# Altium PCB deprecated-layout.PcbDoc
Units mil, origin at the board's own origin, x right, y up, seen from the top; angles counter-clockwise.
Board outline 1220.47 x 1233.89 mil, 2 copper layers (Top Layer, Bottom Layer); 14 components, 11 nets, 51 pads, 0 vias.
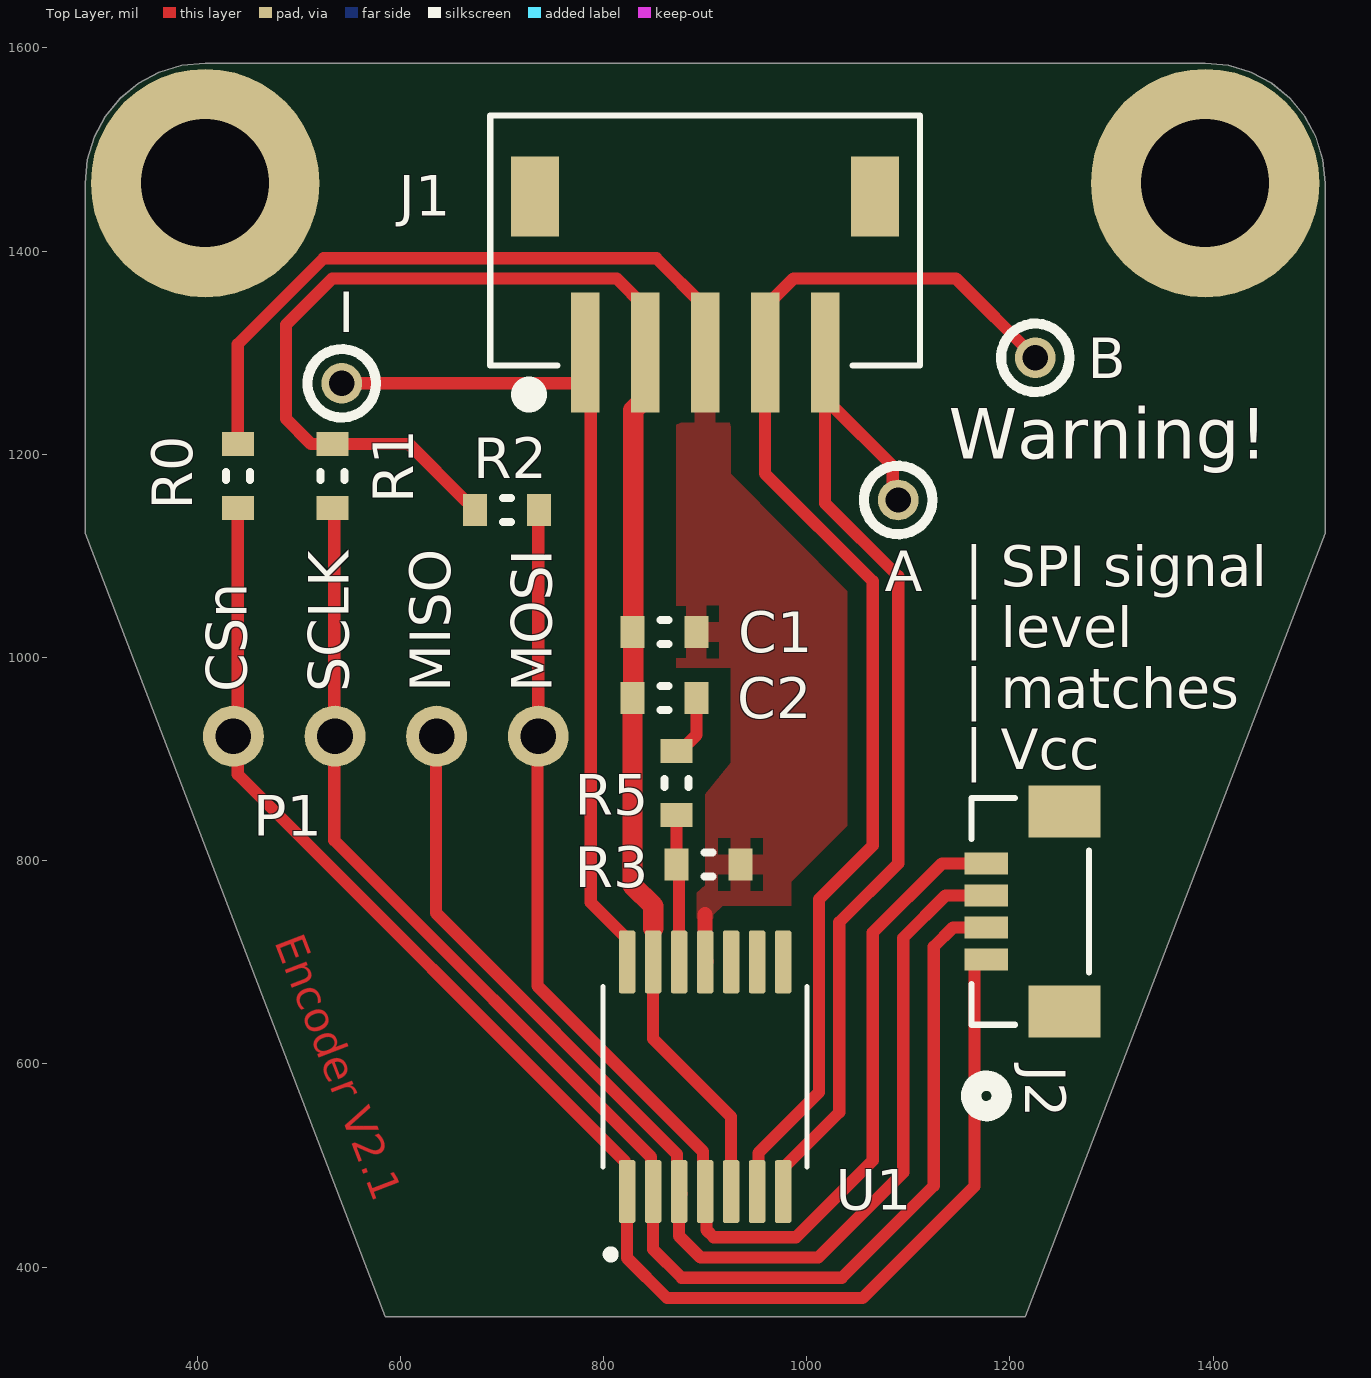
[diagram p0: Top Layer view]
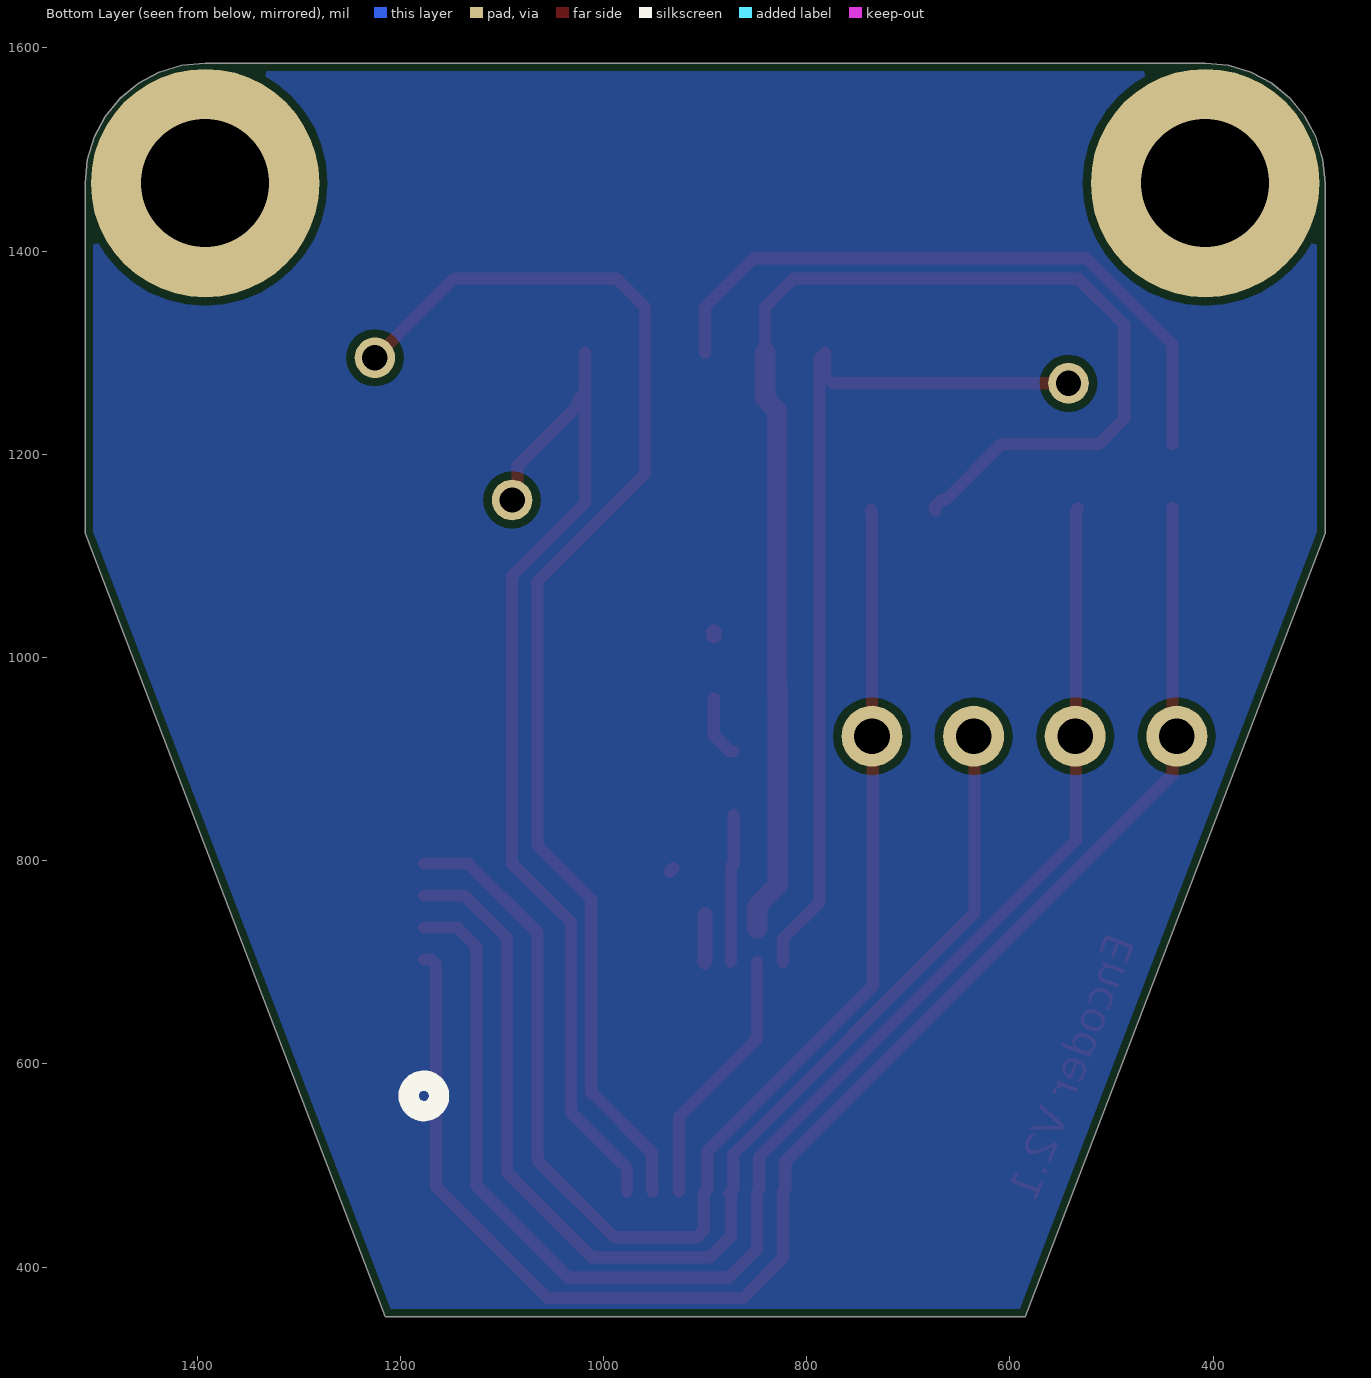
[diagram p1: Bottom Layer view, seen from below]

## Layer stack, top to bottom
Top Solder: solder mask 0.4, Solder Resist, Dk 3.5
Top Layer: signal copper 1.4
Dielectric 1: dielectric 12.6, FR-4, Dk 4.8
Bottom Layer: signal copper 1.4
Bottom Solder: solder mask 0.4, Solder Resist, Dk 3.5

## Board outline
407.87,1585 384.83,1582.73 362.68,1576.01 342.26,1565.09 324.36,1550.41 309.67,1532.51 298.75,1512.09 292.03,1489.93 289.76,1466.89 289.76,1122.31 585.04,351.11 1214.96,351.11 1510.24,1122.31 1510.24,1466.89 1507.97,1489.93 1501.25,1512.09 1490.33,1532.51 1475.64,1550.41 1457.74,1565.09 1437.32,1576.01 1415.17,1582.73 1392.13,1585

## Design rules (kind name [scope] priority, off if disabled: settings)
BoardOutlineClearance [All] p1: gap=7.87 ignorepadtopadclearanceinfootprint=FALSE except(15.75: Arc-SplitBarrior Arc-SplitContinuation Track-SplitBarrior Track-SplitContinuation SMDPad-SplitBarrior SMDPad-SplitContinuation THPad-SplitBarrior THPad-SplitContinuation Via-SplitBarrior Via-SplitContinuation Fill-SplitBarrior Fill-SplitContinuation Poly-SplitBarrior Poly-SplitContinuation Region-SplitBarrior Region-SplitContinuation Text-SplitBarrior Text-SplitContinuation)
Clearance "Clearance Bottom Layer" [OnLayer('Bottom Layer')] p1: gap=8 ignorepadtopadclearanceinfootprint=TRUE except(10: Arc-Text Track-Text SMDPad-Text THPad-Text Via-Text Fill-Text Poly-Text Region-Text Text-Text)
Clearance "Clearance Top Layer" [OnLayer('Top Layer')] p2: gap=8 ignorepadtopadclearanceinfootprint=TRUE except(10: Arc-Text Track-Text SMDPad-Text THPad-Text Via-Text Fill-Text Poly-Text Region-Text Text-Text)
Clearance [All] p3: gap=7.87 ignorepadtopadclearanceinfootprint=FALSE except(3.5: Arc-Arc Arc-Track Arc-SMDPad Track-Track Track-SMDPad SMDPad-SMDPad; 5: Arc-Via Track-Via SMDPad-Via THPad-Via Via-Via; 10: Arc-Text Track-Text SMDPad-Text THPad-Text Via-Text Fill-Text Poly-Text Region-Text Text-Text)
HoleSize [All] p1: absolutevalues=TRUE maxlimit=248.03 minlimit=7.87 maxpercent=80.000 minpercent=20.000
MinimumAnnularRing [All] p1: minimumring=3
MinimumSolderMaskSliver [All] p1: minsoldermaskwidth=3.94
PolygonConnect PolygonConnect_1 [All] p1: thpad.connectstyle=Relief thpad.reliefconductorwidth=20 thpad.reliefentries=4 thpad.polygonreliefangle="90 Angle" thpad.airgapwidth=10 smdpad.connectstyle=Relief smdpad.reliefconductorwidth=20 smdpad.reliefentries=4 smdpad.polygonreliefangle="90 Angle" smdpad.airgapwidth=10 via.connectstyle=Direct via.reliefconductorwidth=20 via.reliefentries=4 via.polygonreliefangle="90 Angle" via.airgapwidth=10
RoutingCorners [All] p1: cornerstyle=Round minsetback=100 maxsetback=100
RoutingVias [All] p1: holewidth=19.68 width=39.37 viastyle="Through Hole" minholewidth=7.87 minwidth=17.72 maxholewidth=39.37 maxwidth=78.74
SilkToSilkClearance [All] p1: silktosilkclearance=3.94
SilkToSolderMaskClearance [IsPad] p1: minsilkscreentomaskgap=3.94 clearancetoexposedcopper=TRUE
SolderMaskExpansion [All] p1: expansion=4 istentingtop=FALSE
Width [All] p1: maxlimit=100 minlimit=3.5 preferedwidth=15
25 further rules are at their usual default settings.

## Components (designator, comment, footprint, x,y, rotation, side; value= is the part's Value field where it differs from the comment)
A "Test Point (Via)" TP 1090,1155 r0 top
B "Test Point (Via)" TP 1225,1295 r90 top
C1 "0.10uF" 0603#1 860,1025 r0 top
C2 "1.0uF" 0603#1 860,960 r180 top
I "Test Point (Via)" TP 542.37,1269.84 r90 top
J1 "S5B-ZR-SM4A-TF (LF) (SN)" JST_S5B-ZR-SM4A-TF 781.89,1300 r0 top
J2 "SM04B-SURS-TF(LF)(SN)" CONN_SM04B-SURS-TF_JST 1220,750 r90 top
P1 "POGO 4 PIN THRU" "POGO 4 PIN THRU" 435.75,922.5 r0 top
R0 "4.7k" 0603#2 440,1178.5 r90 top
R1 "4.7k" 0603#2 533,1178.5 r90 top
R2 "4.7k" 0603#2 705,1145 r180 top
R3 "JUMPER" 0603#1 903.31,796.25 r180 top value=0
R5 "JUMPER" 0603#1 871.81,876.5 r90 top value=0
U1 "AS5047U" AS5047U 900,587.33 r90 top

## Footprints (in the part's own frame and the unit in brackets; to place one, negate y for a bottom-side part, rotate by r counter-clockwise, add the part's x,y. Pads: shape width x height; smd on the part's side, far side on the other; paste and mask are expansions set on the pad)
0603#1 [mm] "Chip Resistor, 2-Leads, Body 1.60x0.80mm, IPC High Density"
  rect 0.6x0.8 smd mask+0.1: 1(-0.8,0) 2(0.8,0)
  silkscreen extent -0.1,-0.3 0.1,0.3, body extent -0.8,-0.4 0.8,0.4, height 0.6
0603#2 [mm] "Chip Resistor, 2-Leads, Body 1.60x0.80mm, IPC High Density"
  rect 0.6x0.8 smd: 1(-0.8,0) 2(0.8,0)
  silkscreen extent -0.1,-0.3 0.1,0.3, body extent -0.8,-0.4 0.8,0.4, height 0.6
AS5047U [mm]
  rrect25% 1.57x0.41 smd: 1(-2.87,1.95) 2(-2.87,1.3) 3(-2.87,0.65) 4(-2.87,0) 5(-2.87,-0.65) 6(-2.87,-1.3) 7(-2.87,-1.95) 8(2.87,-1.95) 9(2.87,-1.3) 10(2.87,-0.65) 11(2.87,0) 12(2.87,0.65) 13(2.87,1.3) 14(2.87,1.95)
  silkscreen extent -4.54,-2.55 2.25,2.55
CONN_SM04B-SURS-TF_JST [mil]
  rect 22x43 smd paste+0 mask+0: 1(-47.24,43.16) 2(-15.75,43.16) 3(15.75,43.16) 4(47.24,43.16)
  rect 51x71 smd: 5(-98.42,-33.61) 6(98.43,-33.61)
  silkscreen extent -196,-58 112,58, body extent 0,0 10,10, height 10
JST_S5B-ZR-SM4A-TF [mil]
  rect 28x118 smd paste+0: 1(0,0) 2(59.06,0) 3(118.11,0) 4(177.17,0) 5(236.22,0)
  rect 47x79 smd: 6(-49.21,153.62) 7(285.43,153.62)
  silkscreen extent -93,-41 330,233, body extent -88,-28 325,228, height 146
"POGO 4 PIN THRU" [mil]
  round 60 hole 35.04: 1(0,0) 2(100,0) 3(200,0) 4(300,0)
TP [mil] "Test point (40mil Standard)"
  round 40 hole 25: 1(0,0)

## Part data
C1: library part "CAP 0.10uF 16V", "CAP CER 0.10UF 16V X5R 0603/0805", Operating Temperature="-55°C ~ 85°C", Package=0603/0805, Rating=16V, Temperature Coefficient=X5R, Tolerance=10%
C2: library part "CAP 1.0uF 16V", "CAP CER 1.0UF 16V X5R 0603/0805", Operating Temperature="-55°C ~ 85°C", Package=0603/0805, Rating=16V, Temperature Coefficient=X5R, Tolerance=10%
J1: library part "CN 5POS JST ZR RA", "Connector Header Surface Mount, Right Angle 5 position 0.059\" (1.50mm)", Mfr_Name=JST, Supplier Part Number 1=455-1696-1-ND, Copyright="Copyright (C) 2021 Ultra Librarian. All rights reserved.", Digi-Key_Part_Number_1=455-1696-2-ND, Digi-Key_Part_Number_2=455-1696-1-ND, Digi-Key_Part_Number_3=455-1696-6-ND, Manufacturer_Part_Number="S5B-ZR-SM4A-TF (LF) (SN)", RefDes=RefDes, Supplier 1=Digi-Key, Type=DEV
J2: "No Description Available", Mfr_Name=JST, Copyright="Copyright (C) 2022 Ultra Librarian. All rights reserved.", Digi-Key_Part_Number_1=455-3589-2-ND, Digi-Key_Part_Number_2=455-3589-1-ND, Digi-Key_Part_Number_3=455-3589-6-ND, Manufacturer_Part_Number=SM04B-SURS-TF(LF)(SN), RefDes=RefDes, Type=DEV
P1: "4 pin POGO Holes 0.100\" Pitch", ComponentLink1Description="POGO Pins", ComponentLink1URL=https://www.digikey.ca/en/products/detail/mill-max-manufacturing-corp/816-22-004-10-001101/6149707?utm_adgroup=Rectangular%20Connectors%20-%20Spring%20Loaded&utm_source=google&utm_medium=cpc&utm_campaign=Shopping_Product_Connectors%2C%20Interconnects&utm_term=&productid=6149707&gclid=CjwKCAjwyIKJBhBPEiwAu7zllx5RKB49Aiz1Tcq0lCLtxeAJbHB79ZaevgMe56kl4rzAjPwbrhvRoBoC1QsQAvD_BwE
R0 R1 R2: library part "RES 4.7k 1/8W - 5%", "RES SMD 4.7k OHM 5% 1/8W 0805", Package=0805, Power (Watts)=0.125W, Tolerance=5%
R3 R5: library part "RES 0 JUMPER", "RES SMD 0 OHM JUMPER GENERIC 0805/0603", Package=0805
U1: "14-Bit On-Axis Magnetic Rotary Position Sensor with Up to 14-Bit Binary Incremental Pulse Count", Supplier Part Number 1=2009466, Supplier 1=RSComponents

## Free pads (board coordinates)
  round 225 hole 125.98: 1(407.87,1466.89) 1(1392.13,1466.89)
  round 225 / inner round 60 / far side round 60 hole 125.98: 5(407.87,1466.89)

## Nets (pads, with @x,y where several pads share a name; then routed paths per layer and width w, separated by ;. In a path a pad name is that pad's centre, name@x,y a point inside that pad or via, vN(x,y) a via of type N, cw(c..) or ccw(c..) an arc to the next point about the centre after c; other vN are vias at no path point)
5V_3v3_Sel: C1.2 J1.3 R0.2 R3.1 U1.11 | length 714.5
  Top Layer w12: R0.2 440,1308.28 524.72,1393 852,1393 900,1345 J1.3 ; R3.1@931.32,792.76 R3.1@934.8,789.27
  Top Layer w15: C1.2@891.5,1021.06 C1.2 ; 900,746.84 U1.11 U1.11@900.57,700.89
A: A.1 J1.5 U1.7 | length 1032.1
  Top Layer w12: U1.7 976.77,497.17 1032.07,552.48 1032.07,739.4 1090,797.33 1090,1080 1018.11,1151.89 J1.5@1018.11,1260 ; J1.5 J1.5@1018.11,1260 ; J1.5@1025,1248.11 1084.64,1188.47 1084.64,1160.36 A.1 ; J1.5@1025,1253.11 J1.5@1018.11,1260
B: B.1 J1.4 U1.6 | length 1271.5
  Top Layer w12: U1.6 952.39,475.55 952.39,512.38 1012.07,572.07 1012.07,762.07 1065,815 1065,1075 959.06,1180.94 J1.4 959.06,1345 987.06,1373 1147,1373 B.1
CSn: J2.1 P1.1 R0.1 U1.1 | length 1532.7
  Top Layer w12: R0.1 440,885 821.16,503.84 821.16,476.41 U1.1 823.23,408.97 862.77,369.43 1055,369.43 1165,479.43 1165,697.76 1170,702.76 J2.1
GND: C1.1 C2.2 J1.2 R1.2 R2.2 U1.5 U1.13 | length 1584.5
  Top Layer w12: R2.2 673.5,1148.94 667.69,1154.75 663.76,1154.75 608.5,1210 R1.2 532.78,1210.22 512.2,1210.22 487.42,1235 487.42,1327.42 533,1373 812.94,1373 840.94,1345 J1.2 ; U1.13 848.82,624.68 925.59,547.91 U1.5
  Top Layer w20: C2.2@828.5,970 828.5,775.78 848.82,755.46 848.82,733.57 ; C2.2@829.28,970 829.28,1025 829.28,1065 829.28,1080 829.28,1243.34 840.94,1255 J1.2
I: I.1 J1.1 U1.14 | length 881.8
  Top Layer w12: I.1 773.89,1269.84 781.89,1277.84 781.89,1294.4 J1.1 787.49,1294.4 787.49,758.89 823.23,723.16 U1.14
MISO: J2.3 P1.3 U1.3 | length 1188
  Top Layer w12: P1.3@635,922.5 635,748.45 872.34,511.11 872.34,476.41 U1.3@876.48,472.27 ; U1.3 874.41,430.59 895.57,409.43 1011.29,409.43 1095,493.14 1095,724.04 1136.71,765.75 J2.3
MOSI: J2.4 P1.4 R2.1 U1.4 | length 1342.1
  Top Layer w12: R2.1 735.75,1144.25 P1.4 735,921.75 735,676.73 897.93,513.8 897.93,476.41 U1.4@901.37,472.97 ; U1.4 U1.4@901.37,472.97 ; J2.4 1133.03,797.24 1065,729.21 1065,504.97 989.46,429.43 908.4,429.43 901.37,436.46 U1.4@901.37,472.97
NetC2_1: C2.1 R5.2 | length 62.5
  Top Layer w12: R5.2 875.75,907.99 891.5,923.74 C2.1
SCLK: J2.2 P1.2 R1.1 U1.2 | length 1480.6
  Top Layer w12: R1.1 535,1145.01 535,820.16 846.75,508.41 846.75,476.41 U1.2 848.82,417.5 876.89,389.43 1034.43,389.43 1125,480 1125,715.22 1144.03,734.25 J2.2
VDD3V3: R3.2 R5.1 U1.12 | length 146.8
  Top Layer w12: R3.2 R5.1 ; R3.2@871.81,797.33 874.41,794.73 U1.12
pads on no net: J1.6 J1.7 J2.5 J2.6 U1.8 U1.9 U1.10

## Polygon pours and split planes (outlines as drawn)
no net on Bottom Layer "NONET_L02_P001" (solid, pour order 1): 0,1695 0,155 2280,155 2280,1725
5V_3v3_Sel on Top Layer "Top Layer-5V_3v3_Sel" (solid, pour order 48): 891.74,768.44 892.1,713.4 908.07,713.4 908.07,746.84 917.52,755.46 984.84,755.46 984.84,779.12 1040,834.27 1040,1065 925,1180.94 925,1260 870,1260 871.81,1258.19 871.81,990 925,990 925,896.18 900,865.59 900,775.78

## Other copper
Top Layer:
  text "Encoder V2.1" at 476.08,720.4 h30 r291

## Silkscreen, mask and mechanical layers (free items; w line width, h text height)
Top Overlay:
  circle w10: c542.37,1269.84 r33.7
  circle w10: c1090,1155 r33.7
  circle w10: c1225,1295 r33.7
  text "Warning!" at 1140,1195.8 h50
  text "CSn" at 449,966 h40 r90
  text "SCLK" at 549,966 h40 r90
  text "MISO" at 649,966 h40 r90
  text "MOSI" at 749,966 h40 r90
  text "| SPI signal / | level  / | matches  / | Vcc" at 1155.34,890 h40
Mechanical 1:
  the board outline again, w10

## Dimensions
1067.32,1453.62 to 1392.13,1466.89 on Dimensions
407.87,1466.89 to 732.68,1453.62 on Dimensions
407.87,1466.89 to 1392.13,1466.89 on Dimensions
1392.13,1466.89 to 900,587.33 on Dimensions